# EAGLE board Harp Motor H2-module v1.0 (EAGLE 9.6.2)
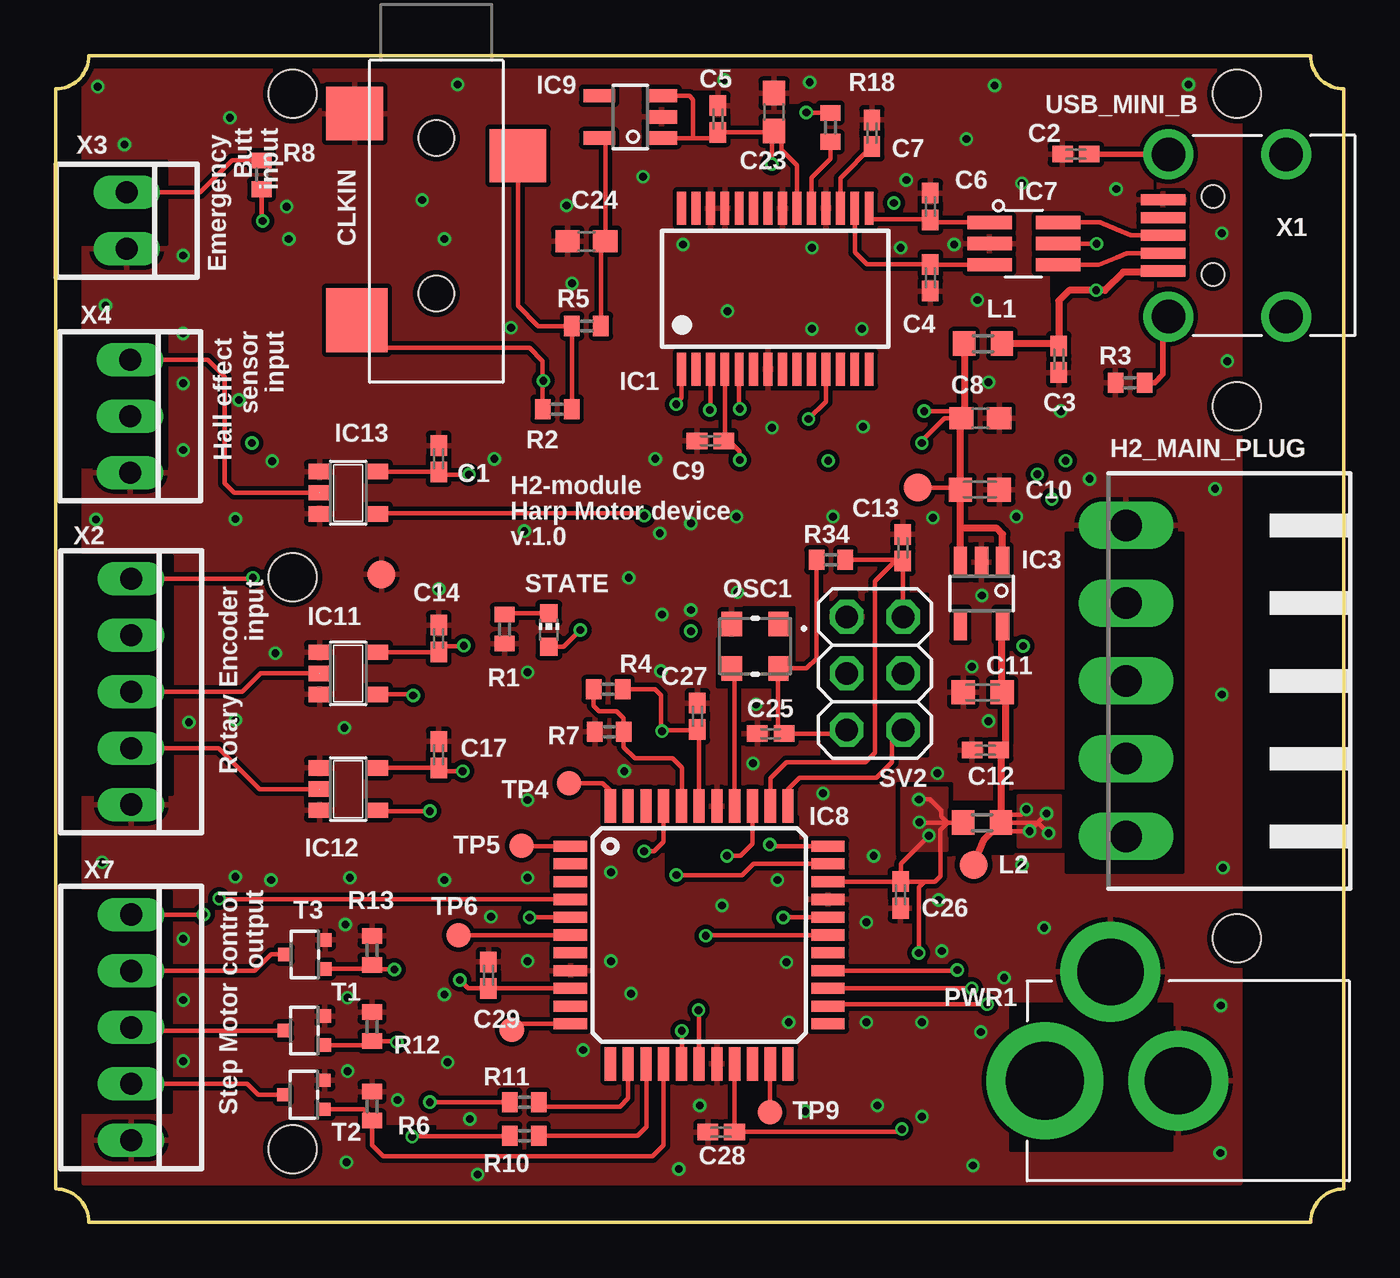
[diagram p0: board, top side]
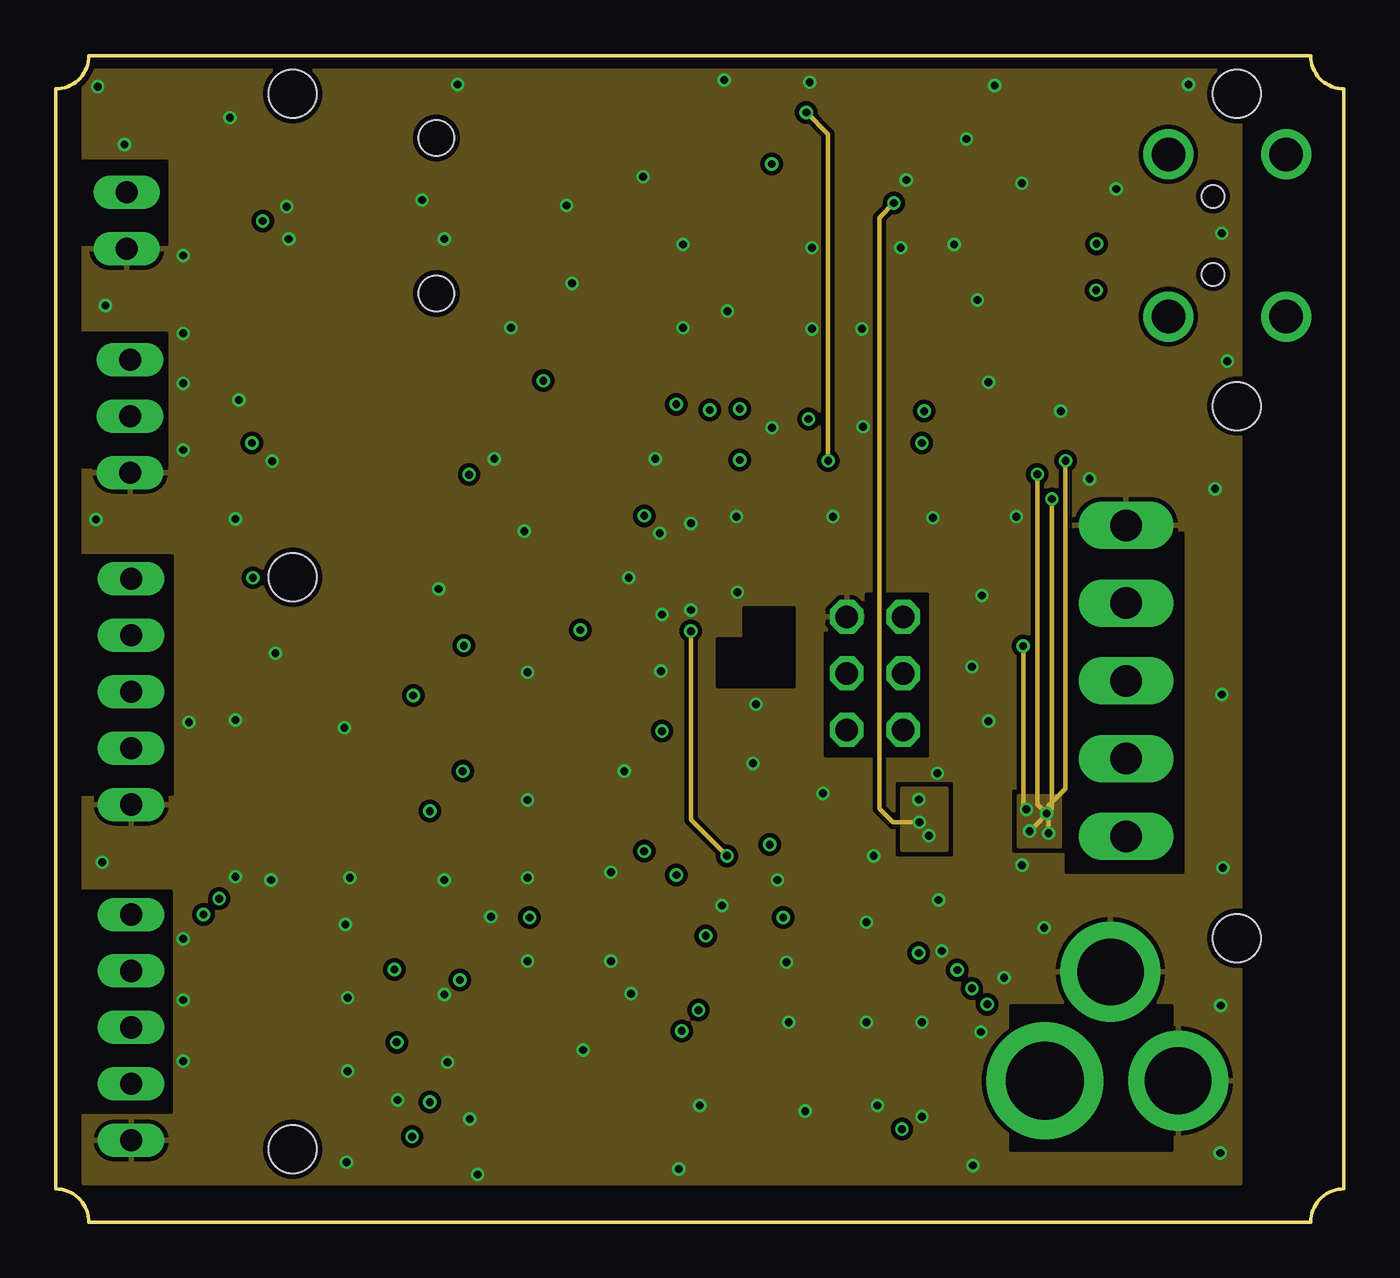
[diagram p1: board, inner layer Route2]
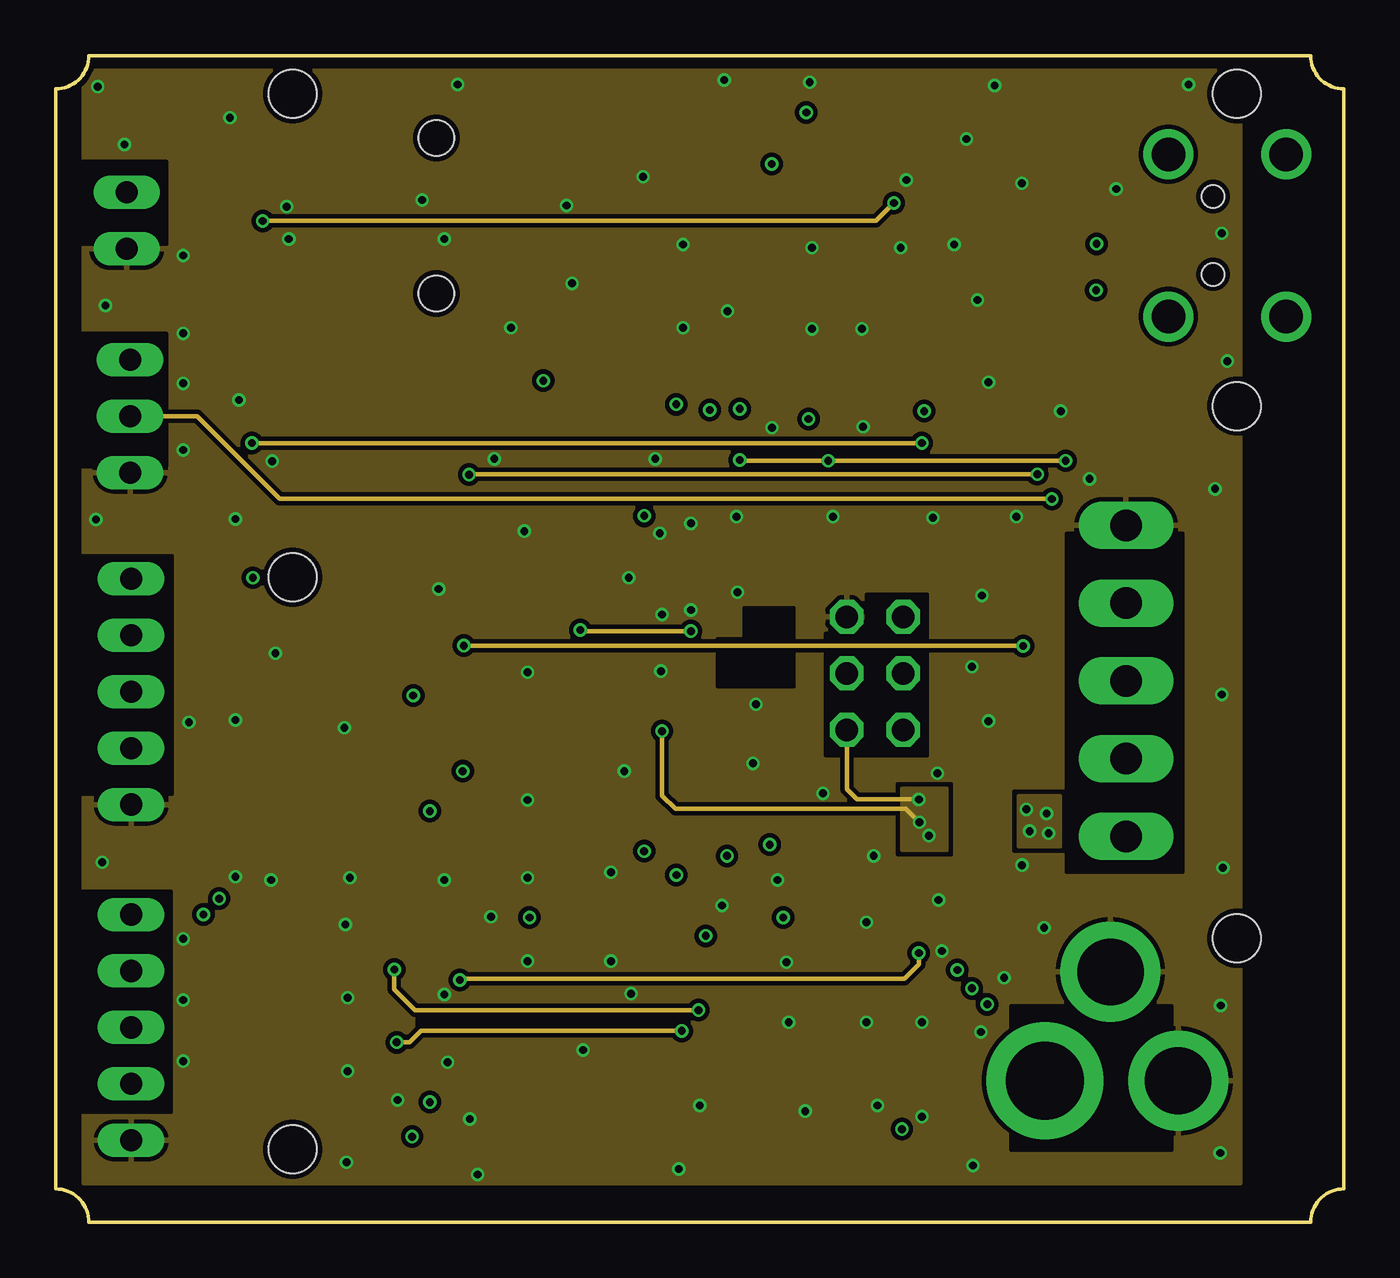
[diagram p2: board, inner layer Route15]
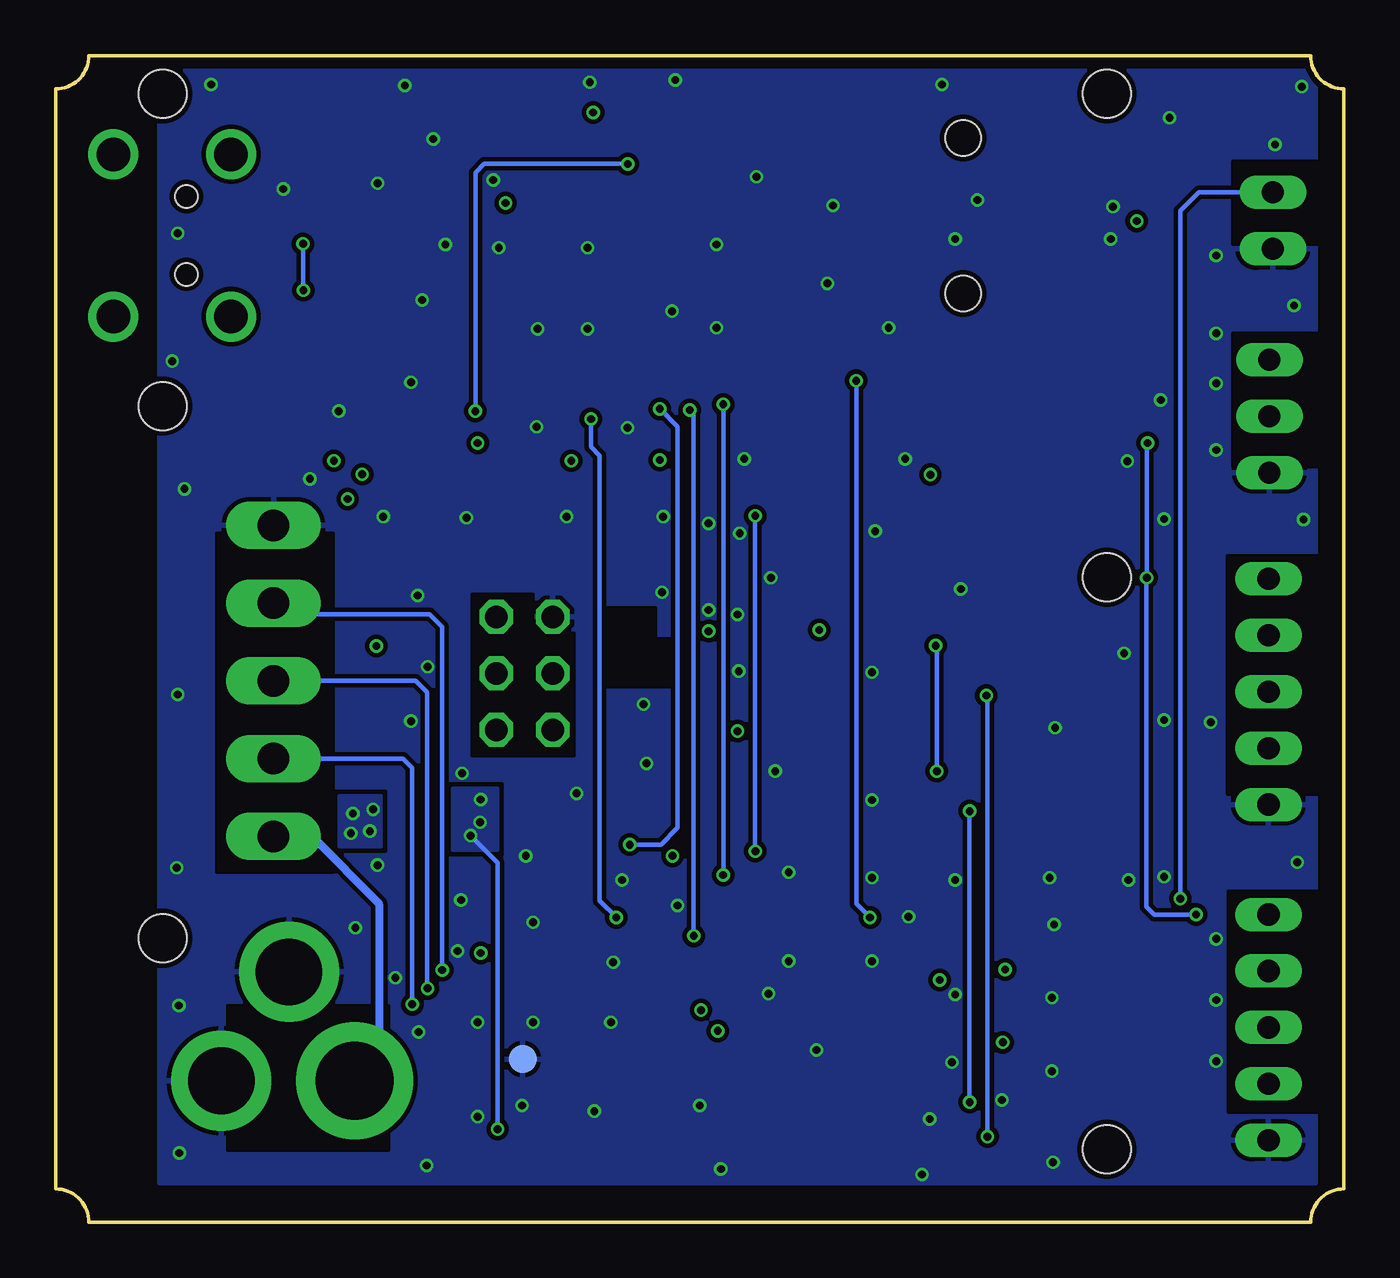
[diagram p3: board, bottom side, seen from below]

Size 58 x 52.5 mm. Coordinates in mm from the lower left corner, seen from the top.
Outline: 56.5,52.5 1.5,52.5 arc-90 0,51 0,1.5 arc-90 1.5,0 56.5,0 arc-90 58,1.5 58,51 arc-90 56.5,52.5
Copper layers (1+2*15+16): Top 0.018mm / dielectric 0.36mm / Route2 0.035mm / dielectric 0.71mm / Route15 0.035mm / dielectric 0.2mm / Bottom 0.018mm
Design rules "my design rules *": minimum track width 0.15mm, minimum drill 0.35mm, track to track 6mil, track to pad 6mil, pad to pad 6mil, via to via 6mil, smd to smd 6mil, copper to edge 0.25mm, drill to drill 0.35mm, minimum pad ring 0.175mm, minimum via ring 0.125mm, stop-mask expansion 0mil, vias tented up to drill 0.45mm, thermal gap 0.2mm
Net classes: 0 default: clearance 0.205 mm
Holes 2.15 mm at 10.68,3.28 10.68,50.78 53.17,12.78 53.17,36.73 53.17,50.78 10.68,29.03

## Footprints (pad centres in the part's own frame; a part is rotated, then mirrored left to right if it is on the bottom)
C0402K = smd 0.925 x 0.74: 1 -0.6,0; 2 0.6,0
C0603 = smd 1.1 x 1: 1 -0.85,0; 2 0.85,0
C0603K = smd 1.05 x 1.08: 1 -0.875,0; 2 0.875,0
35RASMT2BHNTRX = smd 2.4 x 2.55: 1 0.8,3.675; 5 -1.1,-3.675 | smd 2.9 x 2.75: 4 8.2,-3.575 | hole 1.6: 0,0; 7,0
SOT23 = smd 1 x 1.4: 1 -0.95,-1.1; 2 0.95,-1.1; 3 0,1.1
90G-5 = drill 1.422 long: 1 -7,5.25; 2 -3.5,5.25; 3 0,5.25; 4 3.5,5.25; 5 7,5.25
SSOP28 = smd 0.4 x 1.5: 1 -4.225,-3.625; 2 -3.575,-3.625; 3 -2.925,-3.625; 4 -2.275,-3.625; 5 -1.625,-3.625; 6 -0.975,-3.625; 7 -0.325,-3.625; 8 0.325,-3.625; 9 0.975,-3.625; 10 1.625,-3.625; 11 2.275,-3.625; 12 2.925,-3.625; 13 3.575,-3.625; 14 4.225,-3.625; 15 4.225,3.625; 16 3.575,3.625; 17 2.925,3.625; 18 2.275,3.625; 19 1.625,3.625; 20 0.975,3.625; 21 0.325,3.625; 22 -0.325,3.625; 23 -0.975,3.625; 24 -1.625,3.625; 25 -2.275,3.625; 26 -2.925,3.625; 27 -3.575,3.625; 28 -4.225,3.625
TSOT23-5 = smd 0.6 x 1.408: 1 -0.95,-1.404; 2 0,-1.404; 3 0.95,-1.404; 4 0.95,1.404; 5 -0.95,1.404
SOT23-6L = smd 0.6 x 2: P$1 -0.95,-1.55; P$2 0,-1.55; P$3 0.95,-1.55; P$4 0.95,1.55; P$5 0,1.55; P$6 -0.95,1.55
TQFP44 = smd 1.5 x 0.5: 1 -5.8,4; 2 -5.8,3.2; 3 -5.8,2.4; 4 -5.8,1.6; 5 -5.8,0.8; 6 -5.8,0; 7 -5.8,-0.8; 8 -5.8,-1.6; 9 -5.8,-2.4; 10 -5.8,-3.2; 11 -5.8,-4; 23 5.8,-4; 24 5.8,-3.2; 25 5.8,-2.4; 26 5.8,-1.6; 27 5.8,-0.8; 28 5.8,0; 29 5.8,0.8; 30 5.8,1.6; 31 5.8,2.4; 32 5.8,3.2; 33 5.8,4 | smd 0.5 x 1.5: 12 -4,-5.8; 13 -3.2,-5.8; 14 -2.4,-5.8; 15 -1.6,-5.8; 16 -0.8,-5.8; 17 0,-5.8; 18 0.8,-5.8; 19 1.6,-5.8; 20 2.4,-5.8; 21 3.2,-5.8; 22 4,-5.8; 34 4,5.8; 35 3.2,5.8; 36 2.4,5.8; 37 1.6,5.8; 38 0.8,5.8; 39 0,5.8; 40 -0.8,5.8; 41 -1.6,5.8; 42 -2.4,5.8; 43 -3.2,5.8; 44 -4,5.8
SOT23-5 = smd 0.69 x 0.99: 1 -0.95,-1.29; 2 0,-1.29; 3 0.95,-1.29; 4 0.95,1.3; 5 -0.95,1.3
R0603 = smd 1 x 1.1: 1 -0.85,0; 2 0.85,0
OSCILLATOR_3.2X2.5 = smd 0.9 x 1.1: P$1 -1.05,-1; P$2 1.05,-1; P$3 1.05,1; P$4 -1.05,1
DC_POWER_INPUT_2.1MM = drill 3.5: P1 8.5,0 | drill 3: P2 2.5,0; P3 5.55,-4.9
R0402$1 = smd 0.7 x 0.9: 1 -0.65,0; 2 0.65,0
CHIP-LED0603 = smd 0.8 x 0.8: A 0,-0.75; C 0,0.75
2X03 = drill 1.016 octagon: 1 -2.54,-1.27; 2 -2.54,1.27; 3 0,-1.27; 4 0,1.27; 5 2.54,-1.27; 6 2.54,1.27
SOT323 = smd 0.6 x 0.55: 1 -0.65,-0.925; 2 0.65,-0.925; 3 0,0.925
B1,27 = smd 1.27 x 1.27: TP 0,0
TP11R = smd 1.1 x 1.1: TP 0,0
240-0002-1 = smd 0.5 x 2: P$1 -1.6,8.65; P$2 -0.8,8.65; P$3 0,8.65; P$4 0.8,8.65; P$5 1.6,8.65 | drill 1.5: SHIELD_1 -3.65,3.1; SHIELD_2 3.65,3.1; SHIELD_3 3.65,8.4; SHIELD_4 -3.65,8.4 | hole 1: -1.75,6.4; 1.75,6.4
22-23-2051 = drill 1 long: 1 -5.08,0; 2 -2.54,0; 3 0,0; 4 2.54,0; 5 5.08,0
22-23-2021 = drill 1 long: 1 -1.27,0; 2 1.27,0
22-23-2031 = drill 1 long: 1 -2.54,0; 2 0,0; 3 2.54,0

## Placement (x,y rotation side)
C1  100nF  [C0402K]  17.25,34.35 90 top
C2  4.7nF  [C0402K]  45.93,48.07 180 top
C3  100nF  [C0402K]  45.16,38.83 270 top
C4  47pF  [C0402K]  39.38,42.5 270 top
C5  100nF  [C0402K]  29.82,49.64 90 top
C6  47pF  [C0402K]  39.38,45.71 90 top
C7  100nF  [C0402K]  36.75,49.01 90 top
C8  4.7uF  [C0603]  41.63,36.17 0 top
C9  100nF  [C0402K]  29.48,35.16 180 top
C10  4.7uF  [C0603K]  41.61,32.96 0 top
C11  4.7uF  [C0603K]  41.74,23.85 180 top
C12  100nF  [C0402K]  41.85,21.24 180 top
C13  47pF  [C0402K]  38.14,30.35 90 top
C14  100nF  [C0402K]  17.25,26.27 90 top
C17  100nF  [C0402K]  17.25,21.03 90 top
C23  4.7uF  [C0603]  32.35,49.96 90 top
C24  4.7uF  [C0603]  23.9,44.14 180 top
C25  100nF  [C0402K]  32.2,21.98 180 top
C26  100nF  [C0402K]  38.04,14.73 270 top
C27  100nF  [C0402K]  28.89,22.76 90 top
C28  100nF  [C0402K]  29.96,4.06 180 top
C29  100nF  [C0402K]  19.49,11.12 90 top
CLKIN  CLCK_JACK  [35RASMT2BHNTRX]  17.14,48.79 270 top
D4  BAT54  [SOT23]  69.21,9.77 180 top  (outside the outline)
H2_MAIN_PLUG  be sure about plug type  [90G-5]  53.44,24.36 90 top
IC1  FT232RL  [SSOP28]  32.4,42.01 0 top
IC3  LP5907MFX-3.3  [TSOT23-5]  41.69,28.29 180 top
IC7  USBLC6-2SC6  [SOT23-6L]  43.59,44.04 270 top
IC8  ATXMEGA32A4U  [TQFP44]  28.97,12.92 0 top
IC9  TLV70033DDCR  [TSOT23-5]  25.88,49.74 90 top
IC11  74LVC1G125DBV  [SOT23-5]  13.18,24.7 270 top
IC12  74LVC1G125DBV  [SOT23-5]  13.18,19.49 270 top
IC13  74LVC1G125DBV  [SOT23-5]  13.18,32.83 270 top
L1  40R@100MHz  [R0603]  41.75,39.53 0 top
L2  40R@100MHz  [R0603]  41.71,17.98 0 top
OSC1  OSCILLATOR  [OSCILLATOR_3.2X2.5]  31.49,25.92 180 top
PWR1  DC_JACK2.1MM  [DC_POWER_INPUT_2.1MM]  53.04,6.36 180 top
R1  330R  [R0402$1]  20.21,26.69 90 top
R2  10k  [R0402$1]  22.58,36.58 0 top
R3  1M  [R0402$1]  48.37,37.78 0 top
R4  0R  [R0402$1]  24.88,23.98 0 top
R5  10R  [R0402$1]  23.9,40.33 180 top
R6  10k  [R0402$1]  14.25,5.22 270 top
R7  10k  [R0402$1]  24.93,22.08 0 top
R8  10k  [R0402$1]  9.27,47.13 270 top
R10  0R  [R0402$1]  21.1,3.9 180 top
R11  0R  [R0402$1]  21.1,5.4 180 top
R12  10k  [R0402$1]  14.25,8.8 270 top
R13  DNI  [R0402$1]  14.25,12.23 270 top
R18  10k  [R0402$1]  34.87,49.27 270 top
R34  10k  [R0402$1]  34.91,29.8 180 top
STATE  GREEN_LED  [CHIP-LED0603]  22.21,26.65 0 top
SV2  PINHD-2X3  [2X03]  36.89,24.7 90 top
T1  DMG1012UW??  [SOT323]  11.2,8.62 90 top
T2  DMG1012UW??  [SOT323]  11.19,5.74 90 top
T3  DMG1012UW??  [SOT323]  11.22,12.05 90 top
TP1  NO_COMPONENT  [B1,27]  41.33,16.08 0 top
TP4  NO_COMPONENT  [TP11R]  23.11,19.76 0 top
TP5  NO_COMPONENT  [TP11R]  20.99,16.94 0 top
TP6  NO_COMPONENT  [TP11R]  18.14,12.92 0 top
TP8  NO_COMPONENT  [TP11R]  20.54,8.66 0 top
TP9  NO_COMPONENT  [TP11R]  32.16,4.95 180 top
TP10  NO_COMPONENT  [B1,27]  14.67,29.15 0 top
TP11  NO_COMPONENT  [B1,27]  36.97,7.34 0 bottom
TP13  NO_COMPONENT  [B1,27]  38.81,33.06 0 top
X1  USB_MINI_B  [240-0002-1]  58.5,44.41 90 top
X2  Rot_Encoder  [22-23-2051]  3.4,23.87 270 top
X3  EMRG_BUTT_IN_NO  [22-23-2021]  3.2,45.07 270 top
X4  Hall_Effect  [22-23-2031]  3.36,36.27 270 top
X7  STEP_MOTOR  [22-23-2051]  3.4,8.77 270 top

## Library data of the parts
C1 C3 C5 C7 C9 C12 C14 C17 C25-C29 = Harp Motor H2-module v1.0; DIGIKEY_PN: 445-5932-1-ND; MPN: C1005X7R1H104K050BB; NOTES: -; OEPS: OEPS010004; TYPE: SMD
C2 = Harp Motor H2-module v1.0; MPN: CC0402KRX7R8BB472; OEPS: OEPS010001
C4 C6 C13 = Harp Motor H2-module v1.0; MPN: 04025A470JAT2A; OEPS: OEPS080013
C8 = Harp Motor H2-module v1.0; MPN: C1608X6S1C475K080AC; OEPS: OEPS010018
C10 C11 = Harp Motor H2-module v1.0; MPN: C1608X6S1C475K080AC; NOTES: -; OEPS: OEPS010018; TYPE: SMD
C23 C24 = rcl; MPN: C1608X6S1C475K080AC; NOTES: -; TYPE: SMD
CLKIN = harp input expander; MPN: 35RASMT2BHNTRX; NOTES: -; TYPE: SMD
D4 = Harp Motor H2-module v1.0; MPN: BAT54SLT1G; OEPS: OEPS030003
H2_MAIN_PLUG = Harp Motor H2-module v1.0; MPN: 20.155MH/5-E; OC_FARNELL: unknown; OC_NEWARK: unknown; OEPS: OEPS070037
IC1 = VestibularVR H1-module v1.0; MPN: FT232RL; OEPS: OEPS080013
IC3 = VestibularVR H1-module v1.0; MPN: LP5907MFX-3.3/NOPB; NOTES: -; OEPS: OEPS080016; TYPE: SMD
IC7 = VestibularVR H1-module v1.0; MPN: USBLC6-2SC6; OEPS: OEPS030010
IC8 = VestibularVR H1-module v1.0; DIGIKEY_PN: ATXMEGA32A4U-AURCT-ND; MOUSER_PN: 556-ATXMEGA32A4U-AU; MPN: ATXMEGA32A4U-AUR; OEPS: OEPS080012
IC9 = harp input expander; MPN: TLV70033DDCR; NOTES: -; TYPE: SMD
IC11-IC13 TP1 TP4-TP6 TP8 TP9 TP11 TP13 = Harp Motor H2-module v1.0
L1 L2 = Harp Motor H2-module v1.0; MPN: MI0805K400R-10; OEPS: OEPS040003; SPICEPREFIX: R
OSC1 = VestibularVR H1-module v1.0; MPN: DSC1001CI5-032.0000; OEPS: OEPS080018
PWR1 = harp camera controller; DIGIKEY_PN: DIGIKEY N.A.; MOUSER_PN: 163-179PH; MPN: 163-179PH-EX; NOTES: -; TYPE: TH
R1 = Harp Motor H2-module v1.0; DIGIKEY_PN: 541-10.0KLDKR-ND; MPN: RC0402FR-07330RL; OEPS: OEPS020037
R2 R6-R8 R12 R18 R34 = Harp Motor H2-module v1.0; DIGIKEY_PN: 541-10.0KLDKR-ND; MPN: CRCW040210K0FKED; OEPS: OEPS020030
R3 = Harp Motor H2-module v1.0; DIGIKEY_PN: 541-1.00MLCT-ND; MPN: CRCW04021M00FKED; OEPS: OEPS020026
R4 = Harp Motor H2-module v1.0; DIGIKEY_PN: ??; MPN: TBD ?; OEPS: TBD
R5 = Harp Motor H2-module v1.0; DIGIKEY_PN: qwee; MPN: as; OEPS: xx
R10 R11 = Harp Motor H2-module v1.0; DIGIKEY_PN: o 0R; MPN: MPN ??; OEPS: OEPS?? q codigo
R13 = Harp Motor H2-module v1.0; DIGIKEY_PN: -; MPN: -; OEPS: -
STATE = Harp Motor H2-module v1.0; MPN: LTST-C191KGKT; OEPS: OEPS030005
SV2 = Harp Motor H2-module v1.0; CATEGORY: CONNECTOR; MPN: 609-3210-ND; OEPS: OEPS070015; SUB-CATEGORY: PIN-HEADER
T1-T3 = VestibularVR H1-module v1.0; MPN: DMG1012UW-7; OEPS: ?? escolhido muito power??
TP10 = Harp Motor H2-module v1.0; AUX: GND
X1 = VestibularVR H1-module v1.0; MPN: UX60-MB-5S8; OEPS: OEPS070021
X2 X7 = Harp Motor H2-module v1.0; MF: MOLEX; MPN: 22-23-2051; OC_FARNELL: 1462952; OC_NEWARK: 38C9178
X3 = Harp Motor H2-module v1.0; MF: MOLEX; MPN: 22-23-2021; OC_FARNELL: 1462926; OC_NEWARK: 25C3832
X4 = Harp Motor H2-module v1.0; MF: -; MPN: 282834-3; OC_FARNELL: 1462950; OC_NEWARK: 30C0862; OEPS: OEPS070035

## Nets
+3V3: C1.1 C9.1 C11.1 C12.1 C14.1 C17.1 IC1.4 IC3.5 IC11.5 IC12.5 IC13.5 L2.2 R18.1 TP1.TP X4.2
+3V3_U: C25.1 C26.1 C27.1 C28.1 C29.1 IC8.9 IC8.19 IC8.31 IC8.39 L2.1 OSC1.P$4 R4.2 R8.2 R34.2 SV2.2
+5V: C5.1 C8.1 C10.1 C23.1 IC1.20 IC3.1 IC3.3 IC9.1 IC9.3 L1.1 TP13.TP X2.1 X7.1
AREF: IC8.40 R4.1 R7.2
CLOCK_IN: CLKIN.4 IC8.5 R2.1
EMERGENCY_INPUT: IC8.4 R8.1 X3.1
ENCODER_A_PHASE: IC11.2 X2.3
ENCODER_B_PHASE: IC12.2 X2.4
FTDI_CTS: IC1.11 IC8.29
FTDI_RTS: IC1.3 IC8.28
FTDI_RXD: IC1.5 IC8.33
FTDI_TXD: IC1.1 IC8.32
GND: C1.2 C2.2 C3.2 C4.2 C5.2 C6.2 C7.2 C8.2 C9.2 C10.2 C11.2 C12.2 C13.2 C14.2 C17.2 C23.2 C24.2 C25.2 C26.2 C27.2 C28.2 C29.2 CLKIN.5 H2_MAIN_PLUG.5 IC1.7 IC1.18 IC1.21 IC1.25 IC1.26 IC3.2 IC7.P$2 IC8.8 IC8.18 IC8.30 IC8.38 IC9.2 IC11.1 IC11.3 IC12.1 IC12.3 IC13.1 IC13.3 OSC1.P$2 PWR1.P2 PWR1.P3 R1.1 R3.1 R6.1 R7.1 R12.1 R13.1 SV2.6 T1.2 T2.2 T3.2 TP10.TP TP11.TP X1.P$5 X2.5 X3.2 X4.3 X7.5
HALL_EFFCT_IN: IC13.2 X4.1
HARP_H2_CLOCK_IN: H2_MAIN_PLUG.4 IC8.26
HARP_H2_RX: H2_MAIN_PLUG.3 IC8.25
HARP_H2_TX: H2_MAIN_PLUG.2 IC8.24
LED_STATE: IC8.36 STATE.A
N$1: R3.2 X1.SHIELD_4
N$2: IC7.P$4 X1.P$2
N$3: IC7.P$6 X1.P$3
N$9: R1.2 STATE.C
N$11: IC8.44 TP4.TP
N$12: IC8.1 TP5.TP
N$13: IC8.6 TP6.TP
N$15: C2.1 X1.SHIELD_3
N$17: IC8.11 TP8.TP
N$18: IC8.21 TP9.TP
N$38: C7.1 IC1.17
N$59: IC8.14 R10.1
N$60: IC8.13 R11.1
N$103: CLKIN.1 R2.2 R5.2
N$104: C24.1 IC9.5 R5.1
N$175: IC1.19 R18.2
OSC2: IC8.37 OSC1.P$3
PDI_CLK: C13.1 IC8.35 R34.1 SV2.5
PDI_DATA: IC8.34 SV2.1
STEP_DIRECTION: T1.3 X7.3
STEP_ENABLE: T2.3 X7.4
STEP_PULSE: T3.3 X7.2
U_ENCODER_A_PHASE: IC11.4 R10.2
U_ENCODER_B_PHASE: IC12.4 R11.2
U_HALL_EFFCT_IN: IC8.41 IC13.4
U_STEP_DIRECTION: IC8.16 R12.2 T1.1
U_STEP_ENABLE: IC8.15 R6.2 T2.1
U_STEP_PULSE: IC8.17 R13.2 T3.1
USB_POWER: C3.1 IC7.P$5 L1.2 X1.P$1
USBDM: C4.1 IC1.16 IC7.P$3
USBDP: C6.1 IC1.15 IC7.P$1
VDD: H2_MAIN_PLUG.1 PWR1.P1

## Tracks (layer width: path | path; a pad name or v marks a point on that pad's centre or on a via)
+3V3  (via drill 0.35)
  Top 0.203: IC12.5 17.24,20.44 C17.1 17.25,20.3 v18.33,20.3 | IC11.5 17.23,25.65 C14.1 17.5,25.92 18.38,25.92 v18.38,25.95 | IC1.4 30.13,35.21 C9.1 30.33,35.16 30.8,34.69 v30.8,34.3 | IC13.5 17.22,33.78 C1.1 17.36,33.64 v18.62,33.64 | R18.1 33.81,49.92 v33.8,49.94 | v43.7,18.58 43.45,18.33 42.94,18.33 42.59,17.98 L2.2 | L2.2 42.94,17.6 v43.85,17.6 44.23,17.98 v44.7,17.5 | v44.61,18.4 44.2,17.98 L2.2
  Top 0.305: IC3.5 42.61,26.83 C11.1 42.75,23.7 42.75,21.54 C12.1 42.56,20.98 L2.2 41.8,17.22 TP1.TP
  Route2 0.203: v33.8,49.94 34.78,48.95 v34.78,34.27 | v43.56,25.93 43.56,18.58 v43.7,18.58 | v44.85,32.55 44.85,18.6 v43.85,17.6 | v45.47,34.27 45.47,19.51 44.7,18.75 v44.7,17.5 | v44.2,33.66 44.2,18.81 v44.61,18.4
  Route15 0.15: v18.38,25.95 v18.39,25.95 | 18.63,33.66 v18.62,33.64
  Route15 0.203: v44.2,33.66 18.63,33.66 | v18.39,25.95 43.54,25.95 v43.56,25.93 | v30.8,34.3 30.83,34.27 v34.78,34.27 v45.47,34.27 | X4.2 6.38,36.27 10.1,32.55 v44.85,32.55
  Bottom 0.203: v18.33,20.3 18.33,25.89 v18.38,25.95
  pour Top: 43.35,19.19 45.23,19.19 45.23,16.89 43.35,16.89
  pour Route2: 43.35,19.19 45.23,19.19 45.23,16.89 43.35,16.89
  pour Route15: 43.35,19.19 45.23,19.19 45.23,16.89 43.35,16.89
  pour Bottom: 43.35,19.19 45.23,19.19 45.23,16.89 43.35,16.89
+3V3_U  (via drill 0.35)
  Top 0.203: IC8.19 30.57,4.06 | 30.57,4.06 C28.1 | IC8.31 38.06,15.32 C26.1 | IC8.9 C29.1 18.58,10.52 v18.2,10.9 | 40.15,17.98 L2.1 38.91,17.98 v38.89,18 | 40.15,17.98 39.84,17.67 39.84,15.57 39.58,15.32 39.12,15.32 | C26.1 39.12,15.32 | v38.1,4.19 37.98,4.06 30.57,4.06 | SV2.2 35.2,21.98 C25.1 32.53,22.25 32.53,24.91 OSC1.P$4 33.81,24.92 34.26,25.36 R34.2 | v9.33,45.06 9.27,45.06 R8.2 | v38.86,12.11 38.86,15.07 39.12,15.32 | 40.15,17.98 39.88,18.25 39.88,18.52 39.37,19.03 v38.86,19.03 | R4.2 27,23.98 27.25,23.72 27.25,22.15 v27.3,22.1 27.33,22.13 28.9,22.13 C27.1 28.97,22.08 IC8.39 | v39.32,17.4 38.05,16.13 C26.1
  Route2 0.203: v37.74,45.87 37.08,45.2 37.08,18.61 37.69,18 v38.89,18
  Route15 0.203: v37.74,45.87 36.93,45.06 v9.33,45.06 | v18.2,10.9 18.25,10.95 38.21,10.95 38.86,11.61 v38.86,12.11 | v38.89,18 38.29,18.6 27.9,18.6 27.3,19.2 v27.3,22.1 | v38.86,19.03 36.07,19.03 35.62,19.48 SV2.2
  Bottom 0.203: v38.1,4.19 v38.09,4.19 38.09,16.17 v39.32,17.4
  pour Route2: 38.1,19.54 40.13,19.54 40.13,16.74 38.1,16.74
  pour Route15: 38.1,19.54 40.13,19.54 40.13,16.74 38.1,16.74
  pour Bottom: 38.1,19.54 40.13,19.54 40.13,16.74 38.1,16.74
  pour Top: 38.1,19.54 40.13,19.54 40.13,16.74 38.1,16.74
+5V  (via drill 0.35)
  Top 0.203: IC9.1 28.7,48.79 | 28.7,48.79 29.56,48.79 C5.1 32.28,49.04 C23.1 | v39,35.07 39,35.16 40.02,36.17 C8.1 40.45,36.5 v39.1,36.5 | C23.1 32.24,49 v32.24,47.62 | IC1.20 33.38,47.57 32.68,48.26 32.68,48.77 C23.1 | X7.1 v6.66,13.85 | v8.88,29 8.83,28.95 X2.1 | IC9.3 28.54,50.69 28.7,50.52 28.7,48.79 | TP13.TP 40.64,33.06 C10.1
  Top 0.305: L1.1 40.9,36.3 C8.1 40.73,36.13 C10.1 40.73,31.22 | IC3.3 40.73,31.22 | IC3.1 42.63,30.96 42.38,31.22 40.73,31.22
  Route15 0.203: v39,35.07 38.98,35.05 8.86,35.05 v8.84,35.07
  Bottom 0.203: v39.1,36.5 39.1,47.24 38.71,47.62 v32.24,47.62 | v6.66,13.85 8.54,13.85 8.89,14.2 8.89,28.98 v8.88,29 8.88,35.03 v8.84,35.07
AREF
  Top 0.203: IC8.40 28.19,18.75 28.19,20.46 27.78,20.88 26.08,20.88 25.58,21.38 R7.2 25.58,22.67 25.25,23 24.47,23 24.23,23.25 R4.1
CLOCK_IN  (via drill 0.35)
  Top 0.203: CLKIN.4 13.57,40.08 13.96,39.68 14.78,39.35 21.34,39.35 21.93,38.75 R2.1 21.93,37.86 v21.96,37.87 | v21.34,13.72 21.35,13.72 IC8.5
  Bottom 0.203: v21.96,37.87 21.96,14.34 v21.34,13.72
EMERGENCY_INPUT  (via drill 0.35)
  Top 0.203: IC8.4 7.4,14.52 v7.37,14.56 | R8.1 7.94,47.78 6.5,46.34 X3.1
  Bottom 0.203: v7.37,14.56 | v7.37,14.56 7.37,45.51 6.53,46.34 X3.1
ENCODER_A_PHASE
  Top 0.203: IC11.2 9.23,24.7 8.4,23.87 X2.3
ENCODER_B_PHASE
  Top 0.203: IC12.2 9.19,19.49 7.34,21.33 X2.4
FTDI_CTS  (via drill 0.35)
  Top 0.203: IC1.11 34.68,36.93 33.9,36.15 v33.9,36.14 | IC8.29 32.76,13.72 v32.75,13.71
  Bottom 0.203: v32.75,13.71 33.5,14.46 33.5,34.5 33.9,34.89 v33.9,36.14
FTDI_RTS  (via drill 0.35)
  Top 0.203: IC1.3 29.48,36.6 29.43,36.56 v29.45,36.55 | v29.27,12.89 29.36,12.92 IC8.28
  Bottom 0.203: v29.45,36.55 29.27,36.38 v29.27,12.89 | v29.27,12.89
FTDI_RXD  (via drill 0.35)
  Top 0.203: IC1.5 30.78,36.62 v30.8,36.6 | IC8.33 32.22,16.92 v32.15,16.99
  Bottom 0.203: v32.15,16.99 30.75,16.99 29.99,17.75 29.99,35.79 v30.8,36.6
FTDI_TXD  (via drill 0.35)
  Top 0.203: IC1.1 28.18,37.11 27.91,36.84 v27.94,36.81 | v27.95,15.62 30.91,15.62 31.42,16.12 IC8.32
  Bottom 0.203: v27.95,15.62 27.94,15.64 v27.94,36.81
GND  (via drill 0.35)
  other vias: 1.82,31.62 42.28,51.15 52.43,3.12 25.91,10.29 42.7,11 43.51,16.07 41.66,8.56 36.83,16.49 30.7,28.35 31.53,23.31 27.25,24.8 27.3,27.35 40.45,44 36.5,13.5 28.05,2.4 13.1,2.7 19,2.15 29,5.25 33,9 25,15.75 6,22.5 38.05,43.85 33.95,51.3 30.1,51.4 26.45,47.05 18.1,51.2 16.5,46 7.85,49.7 2.25,41.25 17.25,28.5 39.5,31.7 20.5,40.25 23.25,42.25 28.25,40.25 28.25,44 30.25,41 36.3,40.2 45.25,36.5 52.2,33 52.75,38.75 43.25,31.75 52.55,15.95 33.75,5 23.75,7.75 13.15,6.8 13.15,10.1 13.05,13.4 5.75,7.25 5.75,10 5.75,12.75 5.75,37.75 5.75,40 35,31.75 28.6,31.45 19.6,13.75 21.25,11.75 17.65,7.2 17.5,10.25 2.1,16.2 21.25,15.5 13.25,15.5 13,22.25 39.75,14.5 34.55,19.3 52.5,23.75 42,22.55 28.6,27.55 8.1,15.55 41.25,25 41.3,2.55 52.45,9.75 44.5,13.25 39,4.75 37,5.25 39,9 32.5,15.4 21.25,19 21.25,24.75 30.65,31.75 9.75,34.25 5.75,34.75 3.1,48.5 5.75,43.5 31.4,20.65 25,11.75 30,14.25 8.25,37 8.1,31.65 32.25,35.75 36.35,35.8 17.5,44.25 23,45.75 10.5,44.25 27,34.35 19.75,34.35 41,48.75 52.5,44.5 34.05,43.85 34.05,40.2 38.3,46.9 42,37.8 41.5,41.5 36.5,9 51,51.2 47.75,46.5 43.5,46.75 46.55,33.45 10.4,45.7 1.9,51.1 8.1,22.6 9.7,15.4 9.9,25.6 27.2,31 25.8,29 21.1,31.1 25.6,20.3 32.9,11.7 15.4,5.5 18.65,4.65 17.5,15.4 39.7,20.2 41.7,28.2 39.9,12.2
  pour Top (rank 5): 1.27,1.76 53.34,1.76 53.34,51.81 1.27,51.81
  pour Bottom (rank 5): 1.27,1.76 53.34,1.76 53.34,51.81 1.27,51.81
  pour Route2 (rank 5): 1.27,1.76 53.34,1.76 53.34,51.81 1.27,51.81
  pour Route15 (rank 5): 1.27,1.76 53.34,1.76 53.34,51.81 1.27,51.81
HALL_EFFCT_IN
  Top 0.203: IC13.2 8.04,32.83 7.62,33.25 7.62,38.05 6.86,38.81 X4.1
HARP_H2_CLOCK_IN  (via drill 0.35)
  Top 0.203: v40.59,11.35 40.53,11.32 IC8.26
  Bottom 0.203: H2_MAIN_PLUG.4 47.69,27.36 41.16,27.36 40.6,26.8 v40.6,11.36 v40.59,11.35
HARP_H2_RX  (via drill 0.35)
  Top 0.203: v41.25,10.52 IC8.25
  Bottom 0.203: v41.25,10.52 41.27,10.55 41.27,23.85 41.78,24.36 H2_MAIN_PLUG.3
HARP_H2_TX  (via drill 0.35)
  Top 0.203: v41.94,9.8 34.97,9.8 IC8.24
  Bottom 0.203: H2_MAIN_PLUG.2 42.35,20.86 41.94,20.46 v41.94,9.8
LED_STATE  (via drill 0.35)
  Top 0.203: IC8.36 31.37,17.03 30.83,16.49 v30.23,16.49 | v23.62,26.65 22.88,25.9 STATE.A
  Route2 0.203: v30.23,16.49 28.6,18.11 v28.6,26.6
  Route15 0.203: v28.6,26.6 23.67,26.6 v23.62,26.65
N$1
  Top 0.254: R3.2 49.48,37.78 49.85,38.16 49.85,40.51 X1.SHIELD_4
N$2
  Top 0.203: X1.P$2 48.22,43.6 47.75,43.41 46.98,43.09 IC7.P$4
N$3
  Top 0.203: X1.P$3 48.42,44.41 47.75,44.68 47.01,44.99 IC7.P$6
N$4
  cutout Bottom: 45.5,15.75 50.75,15.75 50.75,31 45.5,31
N$5
  cutout Route15: 45.5,15.75 50.75,15.75 50.75,31 45.5,31
N$6
  cutout Route2: 45.5,15.75 50.75,15.75 50.75,31 45.5,31
N$7
  cutout Top: 45.5,15.75 50.75,15.75 50.75,31 45.5,31
N$8
  cutout Bottom: 34.65,21 39.25,21 39.25,28.25 36.5,28.25 36.5,26.5 34.65,26.5
N$9
  Top 0.203: STATE.C 20.27,27.4 R1.2
N$10
  cutout Route15: 34.65,21 39.25,21 39.25,28.25 36.5,28.25 36.5,26.5 34.65,26.5
N$11
  Top 0.203: IC8.44 24.97,19.41 24.63,19.76 TP4.TP
N$12
  Top 0.203: IC8.1 21,16.92 TP5.TP
N$13
  Top 0.203: TP6.TP IC8.6
N$14
  cutout Route2: 34.65,21 39.25,21 39.25,28.25 36.5,28.25 36.5,26.5 34.65,26.5
N$15
  Top 0.254: X1.SHIELD_3 46.53,48.05 C2.1
N$16
  cutout Top: 34.5,21 39.25,21 39.25,28.25 36.5,28.25 36.5,26.5 34.75,26.5 34.75,28.25 34.75,27.25
N$17
  Top 0.203: IC8.11 20.81,8.92 TP8.TP
N$18
  Top 0.203: IC8.21 TP9.TP
N$19
  cutout Bottom: 1.2,4.95 5.2,4.95 5.2,14.9 1.2,14.9
N$20
  cutout Route15: 1.2,4.95 5.2,4.95 5.2,14.9 1.2,14.9
N$21
  cutout Route2: 1.2,4.95 5.2,4.95 5.2,14.9 1.2,14.9
N$22
  cutout Top: 1.2,4.95 5.2,4.95 5.2,14.9 1.2,14.9
N$23
  cutout Bottom: 1.25,19.25 5.25,19.25 5.25,30 1.25,30
N$24
  cutout Route15: 1.25,19.25 5.25,19.25 5.25,30 1.25,30
N$25
  cutout Route2: 1.25,19.25 5.25,19.25 5.25,30 1.25,30
N$26
  cutout Top: 1.25,19.25 5.25,19.25 5.25,30 1.25,30
N$27
  cutout Bottom: 1.1,34 5,34 5,40 1.1,40
N$28
  cutout Route15: 1.1,34 5,34 5,40 1.1,40
N$29
  cutout Route2: 1.1,34 5,34 5,40 1.1,40
N$30
  cutout Top: 1.1,34 5,34 5,40 1.1,40
N$31
  cutout Bottom: 1.1,44 5,44 5,47.75 1.1,47.75
N$32
  cutout Route15: 1.1,44 5,44 5,47.75 1.1,47.75
N$33
  cutout Route2: 1.1,44 5,44 5,47.75 1.1,47.75
N$34
  cutout Top: 1.1,44 5,44 5,47.75 1.1,47.75
N$35
  cutout Bottom: 43,3.25 50.25,3.25 50.25,9.75 43,9.75
N$36
  cutout Route15: 43,3.25 50.25,3.25 50.25,9.75 43,9.75
N$37
  cutout Route2: 43,3.25 50.25,3.25 50.25,9.75 43,9.75
N$38
  Top 0.203: IC1.17 35.33,46.98 C7.1
N$39
  cutout Top: 43,3.25 50.25,3.25 50.25,9.8 43,9.8
N$40
  cutout Route15: 16.25,9.5 16.25,8.5 16.75,8.5 16.75,9.5
N$41
  cutout Route2: 29.8,24.1 33.25,24.1 33.25,27.65 31,27.65 31,26.25 29.8,26.25
N$42
  cutout Top: 29.8,24.1 33.25,24.1 33.25,27.65 31,27.65 31,26.25 29.8,26.25
N$43
  cutout Route15: 29.8,24.1 33.25,24.1 33.25,27.65 31,27.65 31,26.25 29.8,26.25
N$44
  cutout Bottom: 29.8,24.1 33.25,24.1 33.25,27.65 31,27.65 31,26.25 29.8,26.25
N$45
  cutout Route2: 69.75,14.5 74,14.5 74,21.75 71.5,21.75 71.5,20 69.75,20
N$46
  cutout Route2: 72.25,4 74.5,4 74.5,5.75 72.25,5.75
N$47
  cutout Top: 72.25,4 74.5,4 74.5,5.75 72.25,5.75
N$48
  cutout Route15: 72.25,4 74.5,4 74.5,5.75 72.25,5.75
N$49
  cutout Bottom: 72.25,4 74.5,4 74.5,5.75 72.25,5.75
N$50
  cutout Top: 27.5,15.55 28.25,15.55 28.25,17.15 27.5,17.15
N$51
  cutout Top: 72.75,7 75,7 75,8.45 72.75,8.45
N$52
  cutout Top: 27.9,48.9 29.5,48.9 29.5,50.85 27.9,50.85
N$53
  cutout Top: 32.95,47.85 34.55,47.85 34.55,50.25 32.95,50.25
N$54
  cutout Top: 44.85,41.65 45.6,41.65 45.6,42.9 44.85,42.9
N$55
  cutout Top: 40.45,16.6 43.1,16.6 43.1,18.9 40.45,18.9
N$56
  cutout Top: 32.65,16.8 33.4,16.8 33.4,18.25 32.65,18.25
N$57
  cutout Top: 29.4,17.55 30.15,17.55 30.15,18.05 29.4,18.05
N$58
  cutout Top: 35.3,27.85 36.05,27.85 36.05,28.35 35.3,28.35
N$59
  Top 0.203: R10.1 26.2,3.9 26.6,4.3 26.6,7.1 IC8.14
N$60
  Top 0.203: R11.1 21.95,5.2 25.4,5.2 25.77,5.57 IC8.13
N$61
  cutout Top: 14.55,3.2 17.1,3.2 17.1,4.35 14.55,4.35
N$103
  Top 0.203: R2.2 23.25,36.6 R5.2 21.72,40.33 20.82,41.24 CLKIN.1
N$104
  Top 0.203: R5.1 24.55,43.94 C24.1 24.75,48.51 IC9.5
N$175
  Top 0.203: IC1.19 34.03,47.01 34.87,47.86 R18.2
OSC2
  Top 0.203: IC8.37 30.57,24.67 OSC1.P$3
PDI_CLK
  Top 0.203: R34.1 37.85,29.8 | 37.85,29.8 38.02,29.8 C13.1 38.16,29.72 SV2.5 | IC8.35 32.17,19.98 32.9,20.7 36.45,20.7 36.88,21.13 36.88,28.84 37.85,29.8
PDI_DATA
  Top 0.203: IC8.34 32.97,19.49 33.48,19.99 36.95,19.99 37.66,20.7 37.66,21.66 SV2.1
STEP_DIRECTION
  Top 0.203: T1.3 3.75,8.62 X7.3
STEP_ENABLE
  Top 0.203: X7.4 8.62,6.23 9.11,5.74 T2.3
STEP_PULSE
  Top 0.203: T3.3 9.72,12.05 8.97,11.31 X7.2
U_ENCODER_A_PHASE  (via drill 0.35)
  Top 0.203: IC11.4 16.05,23.75 v16.1,23.7 | v16.05,3.85 16.07,3.87 20.41,3.87 R10.2
  Bottom 0.203: v16.05,3.85 16.05,23.65 v16.1,23.7
U_ENCODER_B_PHASE  (via drill 0.35)
  Top 0.203: IC12.4 14.58,18.5 v16.85,18.5 | R11.2 v16.85,5.4
  Bottom 0.203: v16.85,18.5 v16.86,18.49 v16.86,5.41 v16.85,5.4
U_HALL_EFFCT_IN  (via drill 0.35)
  Top 0.203: v26.5,31.79 26.4,31.9 14.5,31.9 IC13.4 | IC8.41 27.37,17.12 26.95,16.7 v26.5,16.7
  Bottom 0.203: v26.5,16.7 26.52,16.72 26.52,31.78 v26.5,31.79
U_STEP_DIRECTION  (via drill 0.35)
  Top 0.203: T1.1 14.07,7.97 R12.2 15.36,8.15 v15.36,8.1 | v28.19,8.61 28.19,7.17 IC8.16
  Route15 0.203: v28.19,8.61 16.45,8.61 15.93,8.1 v15.36,8.1
U_STEP_ENABLE
  Top 0.203: T2.1 13.86,5.09 14.25,4.7 R6.2 14.25,3.47 14.75,2.97 26.87,2.97 27.37,3.47 IC8.15
U_STEP_PULSE  (via drill 0.35)
  Top 0.203: T3.1 14.07,11.4 R13.2 14.45,11.37 v15.25,11.37 | v28.94,9.54 28.97,9.52 IC8.17
  Route15 0.203: v28.94,9.54 16.18,9.54 15.25,10.47 v15.25,11.37
USB_POWER  (via drill 0.35)
  Top 0.203: v46.86,44.03 46.85,44.04 IC7.P$5
  Top 0.305: L1.2 45.06,39.53 C3.1 45.16,41.47 45.63,41.94 v46.84,41.94 47.25,41.94 48.07,42.76 49.19,42.76 X1.P$1
  Bottom 0.203: v46.86,44.03 46.86,41.96 v46.84,41.94
USBDM
  Top 0.203: IC7.P$3 39.39,43.09 C4.1 36.52,43.1 35.98,43.64 IC1.16
USBDP
  Top 0.203: IC1.15 36.63,45.12 39.36,45.12 C6.1 39.5,44.99 IC7.P$1
VDD
  Bottom 0.356: H2_MAIN_PLUG.1 46.46,17.36 43.43,14.34 43.43,7.47 PWR1.P1

## Text on the board
tPlace: H2-module / Harp Motor device / v.1.0
tNames: Emergency / Butt / input | Hall effect / sensor / input | Rotary Encoder / input | Step Motor control / output
tTest: camm_trigg_1 | camm_trigg_2 | lick_port_1 | lick_port_2 | reward_valve_1 | reward_valve_2 | Optical_flow_1 | Optical_flow_2